# Altium PCB armControlBoardRico.PcbDoc
Units mil, origin at the board's own origin, x right, y up, seen from the top; angles counter-clockwise.
Board outline 1475.03 x 3302.52 mil, 2 copper layers (Top Layer, Bottom Layer); 31 components, 60 nets, 70 pads, 0 vias.
Unrouted connection lines stored in the file: 32.
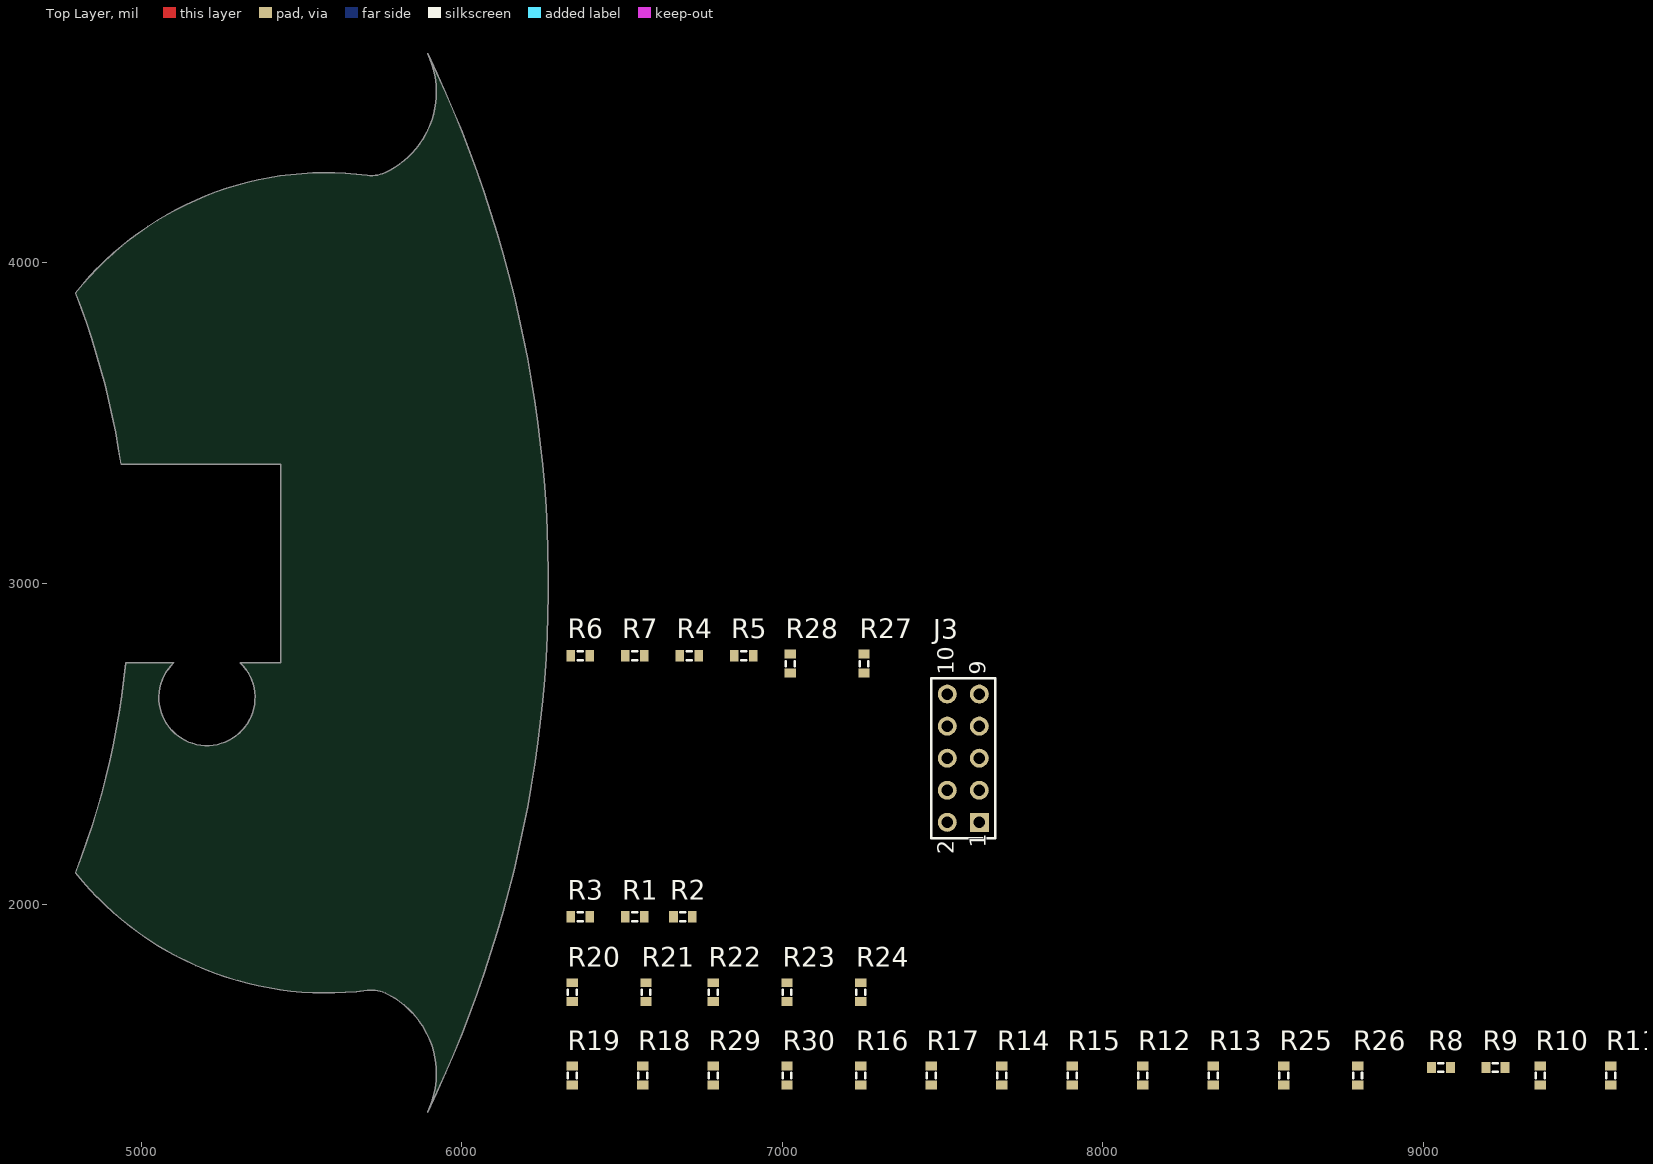
[diagram p0: Top Layer view]
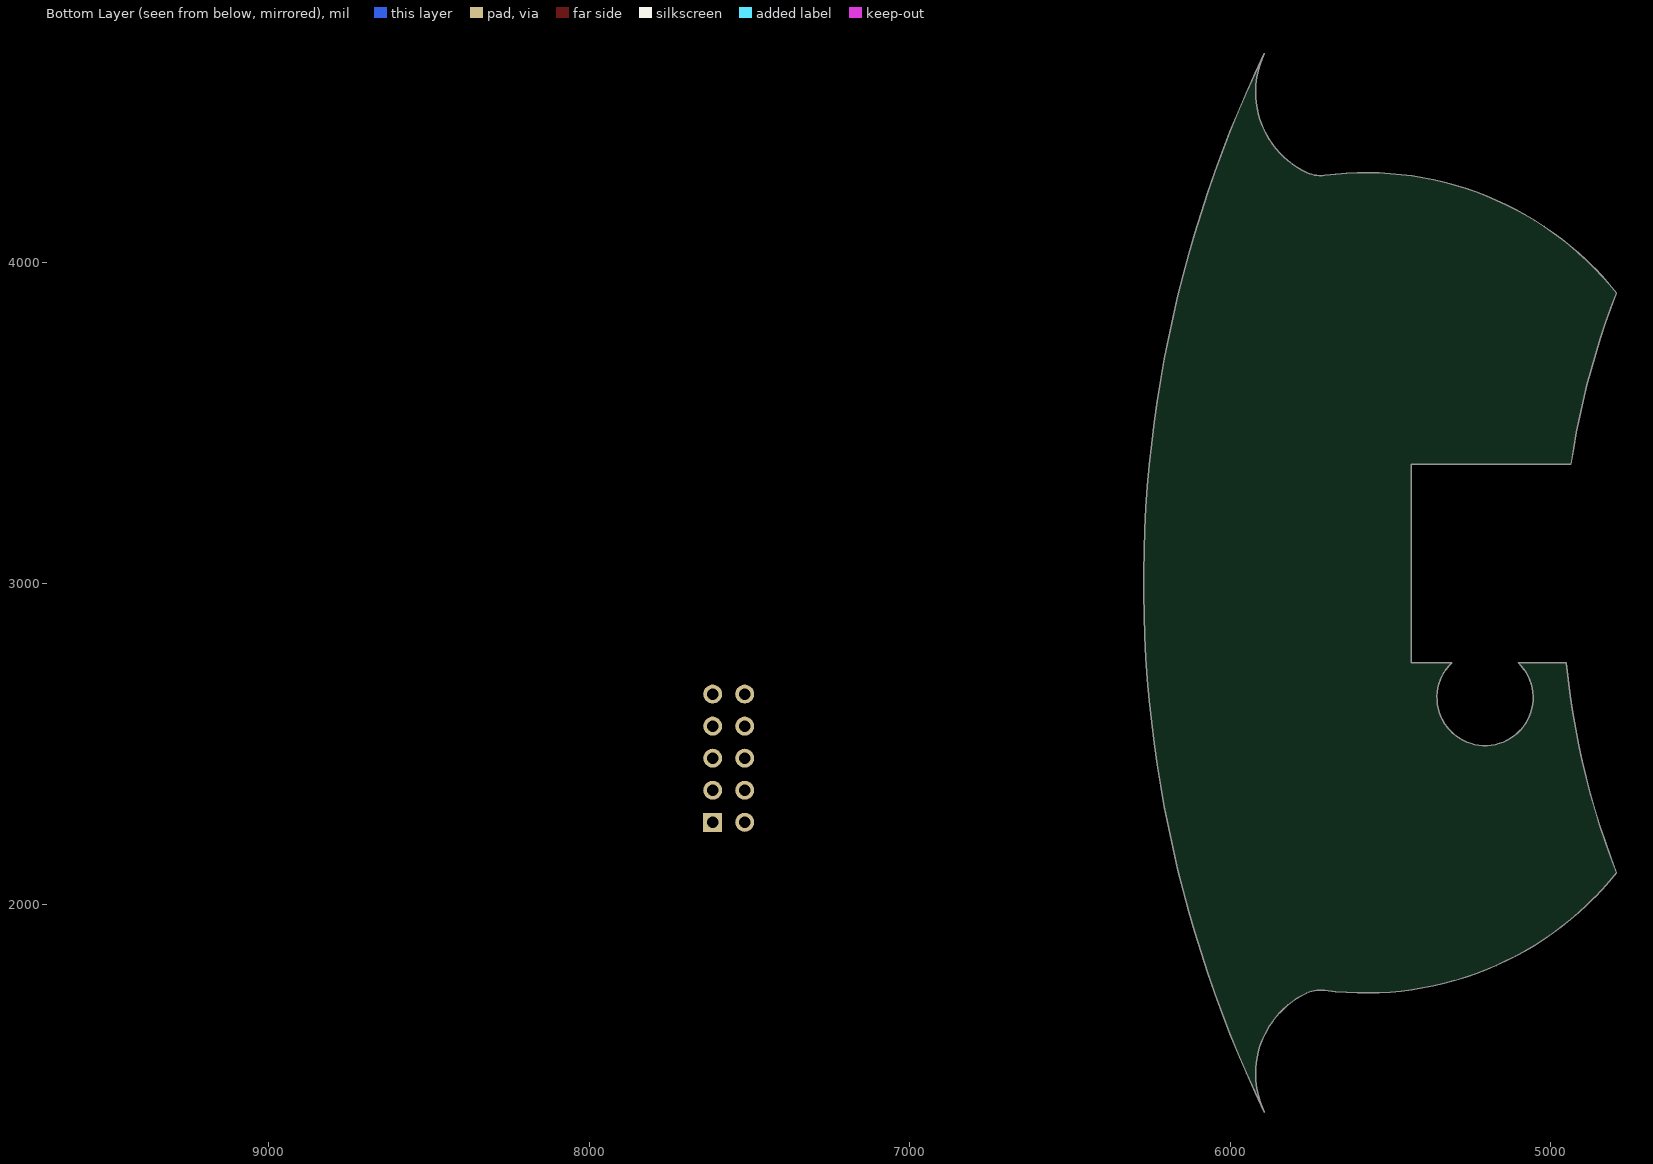
[diagram p1: Bottom Layer view, seen from below]

## Layer stack, top to bottom
Top Layer: signal copper 1.4
Dielectric: dielectric 12.6, FR-4, Dk 4.8
Bottom Layer: signal copper 1.4

## Board outline
4795.29,2097.47 ccw(c2464.71,3002.11) 4952.18,2752.11 5101.2,2752.11 ccw(c5205.29,2644.11) 5309.39,2752.11 5435.29,2752.11 5435.29,3372.11 4937.18,3372.11 ccw(c2464.71,3002.11) 4795.29,3906.75 cw(c5575.9,3281.74) 5705.68,4273.28 ccw(c5718.65,4372.43) 5760.89,4281.79 ccw(c5643.81,4533.08) 5893.58,4653.37 cw(c2464.71,3002.11) 5893.58,1350.85 ccw(c5643.81,1471.14) 5760.89,1722.43 ccw(c5718.65,1631.78) 5705.68,1730.94 cw(c5575.9,2722.48)

## Design rules (kind name [scope] priority, off if disabled: settings)
Clearance [All] p1: gap=6
PolygonConnect [All] p1: connectstyle=Relief reliefconductorwidth=10 reliefentries=4 polygonreliefangle="90 Angle"
RoomDefinition Peripheralsv2 [InComponentClass('Peripheralsv2')] p1: confinementstyle=ConfineIn formatcopy=TRUE lockcomponents=FALSE outline 0,0 2000,0 2000,1000 0,1000
RoomDefinition MSP430v2 [InComponentClass('MSP430v2')] p2: confinementstyle=ConfineIn formatcopy=TRUE lockcomponents=FALSE outline 0,0 2000,0 2000,1000 0,1000
RoomDefinition motorDriverv2 [InComponentClass('motorDriverv2')] p3: confinementstyle=ConfineIn formatcopy=TRUE lockcomponents=FALSE outline 0,0 2000,0 2000,1000 0,1000
RoomDefinition currentSensev2 [InComponentClass('currentSensev2')] p4: confinementstyle=ConfineIn formatcopy=TRUE lockcomponents=FALSE outline 0,0 2000,0 2000,1000 0,1000
RoomDefinition Peripherals [InComponentClass('Peripherals')] p5: confinementstyle=ConfineIn formatcopy=TRUE lockcomponents=FALSE outline 0,0 2000,0 2000,1000 0,1000
RoomDefinition MSP430 [InComponentClass('MSP430')] p6: confinementstyle=ConfineIn formatcopy=TRUE lockcomponents=FALSE outline 0,0 2000,0 2000,1000 0,1000
RoomDefinition motorDriver [InComponentClass('motorDriver')] p7: confinementstyle=ConfineIn formatcopy=TRUE lockcomponents=FALSE outline 0,0 2000,0 2000,1000 0,1000
RoomDefinition currentSense [InComponentClass('currentSense')] p8: confinementstyle=ConfineIn formatcopy=TRUE lockcomponents=FALSE outline 0,0 2000,0 2000,1000 0,1000
RoutingVias [All] p1: holewidth=28 width=50 viastyle="Through Hole" minholewidth=28 minwidth=50 maxholewidth=28 maxwidth=50
SilkscreenOverComponentPads [All] p1: minsilkscreentomaskgap=10
SolderMaskExpansion [All] p1: expansion=4
Width "Schematic Width Constraint_6" [InNet('VBAT')] p1: maxlimit=25 minlimit=10 preferedwidth=20 minimp=50.000000 maximp=50.000000 favimp=50.000000
Width "Schematic Width Constraint_5" [InNet('3.3V')] p2: maxlimit=25 minlimit=10 preferedwidth=20 minimp=50.000000 maximp=50.000000 favimp=50.000000
Width "Schematic Width Constraint_4" [InNet('MOT1_B')] p3: maxlimit=25 minlimit=10 preferedwidth=20 minimp=50.000000 maximp=50.000000 favimp=50.000000
Width "Schematic Width Constraint_3" [InNet('MOT1_A')] p4: maxlimit=25 minlimit=10 preferedwidth=20 minimp=50.000000 maximp=50.000000 favimp=50.000000
Width "Schematic Width Constraint_2" [InNet('MOT0_B')] p5: maxlimit=25 minlimit=10 preferedwidth=20 minimp=50.000000 maximp=50.000000 favimp=50.000000
Width "Schematic Width Constraint_1" [InNet('MOT0_A')] p6: maxlimit=25 minlimit=10 preferedwidth=20 minimp=50.000000 maximp=50.000000 favimp=50.000000
Width "Schematic Width Constraint" [InNet('GND')] p7: maxlimit=25 minlimit=10 preferedwidth=20 minimp=50.000000 maximp=50.000000 favimp=50.000000
Width [All] p8: maxlimit=10 minlimit=6 preferedwidth=10 minimp=50.000000 maximp=50.000000 favimp=50.000000
27 further rules are at their usual default settings.

## Classes and differential pairs
component class currentSense: C6 C7 C8 C9 U4 U5 U6 U7
component class motorDriver: C2 C3 C4 C5 J7 J8 U8
component class MSP430: C1 D1 D2 SW1 U1
component class Peripherals: J1 J2 J4 J5 J6 J9 J10 Q1 Q2 U2 U3

## Components (designator, comment, footprint, x,y, rotation, side; value= is the part's Value field where it differs from the comment)
J3 "JTAG" HDR2X5 7615,2255 r90 top
R1 "DiodeRes" J1-0603 6540,1960 r0 top
R2 "ResetRes" J1-0603 6690,1960 r0 top
R3 "DiodeRes" J1-0603 6370,1960 r0 top
R4 "A" J1-0603 6710,2775 r0 top
R5 "A" J1-0603 6880,2775 r0 top
R6 "E2" J1-0603 6370,2775 r0 top
R7 "E2" J1-0603 6540,2775 r0 top
R8 "R_IN" J1-0603 9055,1490 r0 top
R9 "RLOAD" J1-0603 9225,1490 r0 top
R10 "R_IN" J1-0603 9365,1465 r90 top
R11 "RLOAD" J1-0603 9585,1465 r90 top
R12 "R_OUT" J1-0603 8125,1465 r90 top
R13 "R_OUT" J1-0603 8345,1465 r90 top
R14 "R_IN" J1-0603 7685,1465 r90 top
R15 "RLOAD" J1-0603 7905,1465 r90 top
R16 "R_IN" J1-0603 7245,1465 r90 top
R17 "RLOAD" J1-0603 7465,1465 r90 top
R18 "R_OUT" J1-0603 6565,1465 r90 top
R19 "R_OUT" J1-0603 6345,1465 r90 top
R20 "MotorRes" J1-0603 6345,1725 r90 top
R21 "MotorRes" J1-0603 6575,1725 r90 top
R22 "MotorRes" J1-0603 6785,1725 r90 top
R23 "MotorRes" J1-0603 7015,1725 r90 top
R24 "MotorRes" J1-0603 7245,1725 r90 top
R25 "LPF" J1-0603 8565,1465 r90 top
R26 "LPF" J1-0603 8795,1465 r90 top
R27 "" J1-0603 7255,2750 r90 top
R28 "" J1-0603 7025,2750 r90 top
R29 "LPF" J1-0603 6785,1465 r90 top
R30 "LPF" J1-0603 7015,1465 r90 top

## Footprints (in the part's own frame and the unit in brackets; to place one, negate y for a bottom-side part, rotate by r counter-clockwise, add the part's x,y. Pads: shape width x height; smd on the part's side, far side on the other; paste and mask are expansions set on the pad)
HDR2X5 [mm] "Connector; Header; 5x2 Position"
  rect 1.5x1.5 hole 0.9: 1(0,0)
  round 1.5 hole 0.9: 2(0,2.54) 3(2.54,0) 4(2.54,2.54) 5(5.08,0) 6(5.08,2.54) 7(7.62,0) 8(7.62,2.54) 9(10.16,0) 10(10.16,2.54)
  silkscreen extent -1.27,-1.27 11.43,3.81
J1-0603 [mm] "Chip Resistor, Body 1.6x0.8mm, IPC High Density"
  rect 0.7x0.9 smd: 1(-0.75,0) 2(0.75,0)
  silkscreen extent -0.2,-0.35 0.2,0.35, body extent -0.85,-0.48 0.85,0.48, height 0.9

## Part data
J3: library part "Header 5X2", "Header, 5-Pin, Dual row"
R1 R2 R3 R4 R5 R6 R7 R8 R9 R10 R11 R12 R13 R14 R15 R16 R17 R18 R19 R20 R21 R22 R23 R24 R25 R26 R27 R28 R29 R30: library part Res3, "Resistor"

## Nets (pads, with @x,y where several pads share a name; then routed paths per layer and width w, separated by ;. In a path a pad name is that pad's centre, name@x,y a point inside that pad or via, vN(x,y) a via of type N, cw(c..) or ccw(c..) an arc to the next point about the centre after c; other vN are vias at no path point)
3.3V: J3.2 R2.1 R4.1 R5.1 R28.1
ENCODER0: R6.1
ENCODER1: R7.1
FTDI_RX: 
FTDI_TX: 
GND: J3.8 J3.9 R3.2 R6.2 R7.2 R12.2 R13.1 R18.1 R19.2 R20.2 R21.2 R22.2 R23.2 R24.2 R28.2
GPIO0: 
GPIO1: 
GPIO2: 
GPIO3: 
I2C_SCL: 
I2C_SDA: 
JTAG_BOTTOM_TCK_SPI_CLK: J3.1
JTAG_BOTTOM_TDI_SERVO2_SENSE: J3.7 R29.2
JTAG_BOTTOM_TDO_MOTOR_SENSE: J3.5 R25.2
JTAG_BOTTOM_TEST: J3.6
JTAG_BOTTOM_TMS_SPI_SEL_EXPAND0: J3.3
LED_HEARTBEAT: R1.2
MOT0_A: 
MOT0_B: 
MOT0_PWMA: R21.1
MOT0_PWMB: R22.1
MOT1_A: 
MOT1_B: 
MOT1_PWMA: R23.1
MOT1_PWMB: R24.1
MOT_SLEEP: R20.1
MOTOR_POWER: R9.2
NetC2_1: 
NetC2_2: 
NetC3_1: 
NetC3_2: 
NetC4_1: 
NetD1_2: R1.1
NetD2_2: R3.1
NetQ1_3: R27.2
NetR4_2: R4.2
NetR5_2: R5.2
NetR8_2: R8.2
NetR10_2: R10.2
NetR12_1: R12.1 R25.1
NetR13_2: R13.2 R26.1
NetR14_2: R14.2
NetR16_2: R16.2
NetR18_2: R18.2 R30.1
NetR19_1: R19.1 R29.1
RESET_430: J3.4 R2.2
SERVO0: 
SERVO0_POWER: R15.2
SERVO0_SENSE: R30.2
SERVO1: 
SERVO1_POWER: R11.1
SERVO1_SENSE: R26.2
SERVO2: 
SERVO2_POWER: R17.2
SPI_MISO: 
SPI_MOSI: 
SPI_SEL_EXPAND1: 
VBAT: R27.1
VBAT_SWITCHED: R8.1 R9.1 R10.1 R11.2 R14.1 R15.1 R16.1 R17.1
pads on no net: J3.10

## Silkscreen, mask and mechanical layers (free items; w line width, h text height)
Mechanical 1:
  drawing of 369 lines, arcs and shapes, not listed

## Text inside footprints (layer, text, board x,y; h text height)
J3: Top Overlay "10" at 7535,2715 h50 r90; Top Overlay "9" at 7635,2715 h50 r90; Top Overlay "1" at 7635,2175 h50 r90; Top Overlay "2" at 7535,2155 h50 r90